# EAGLE board io (EAGLE 5.12)
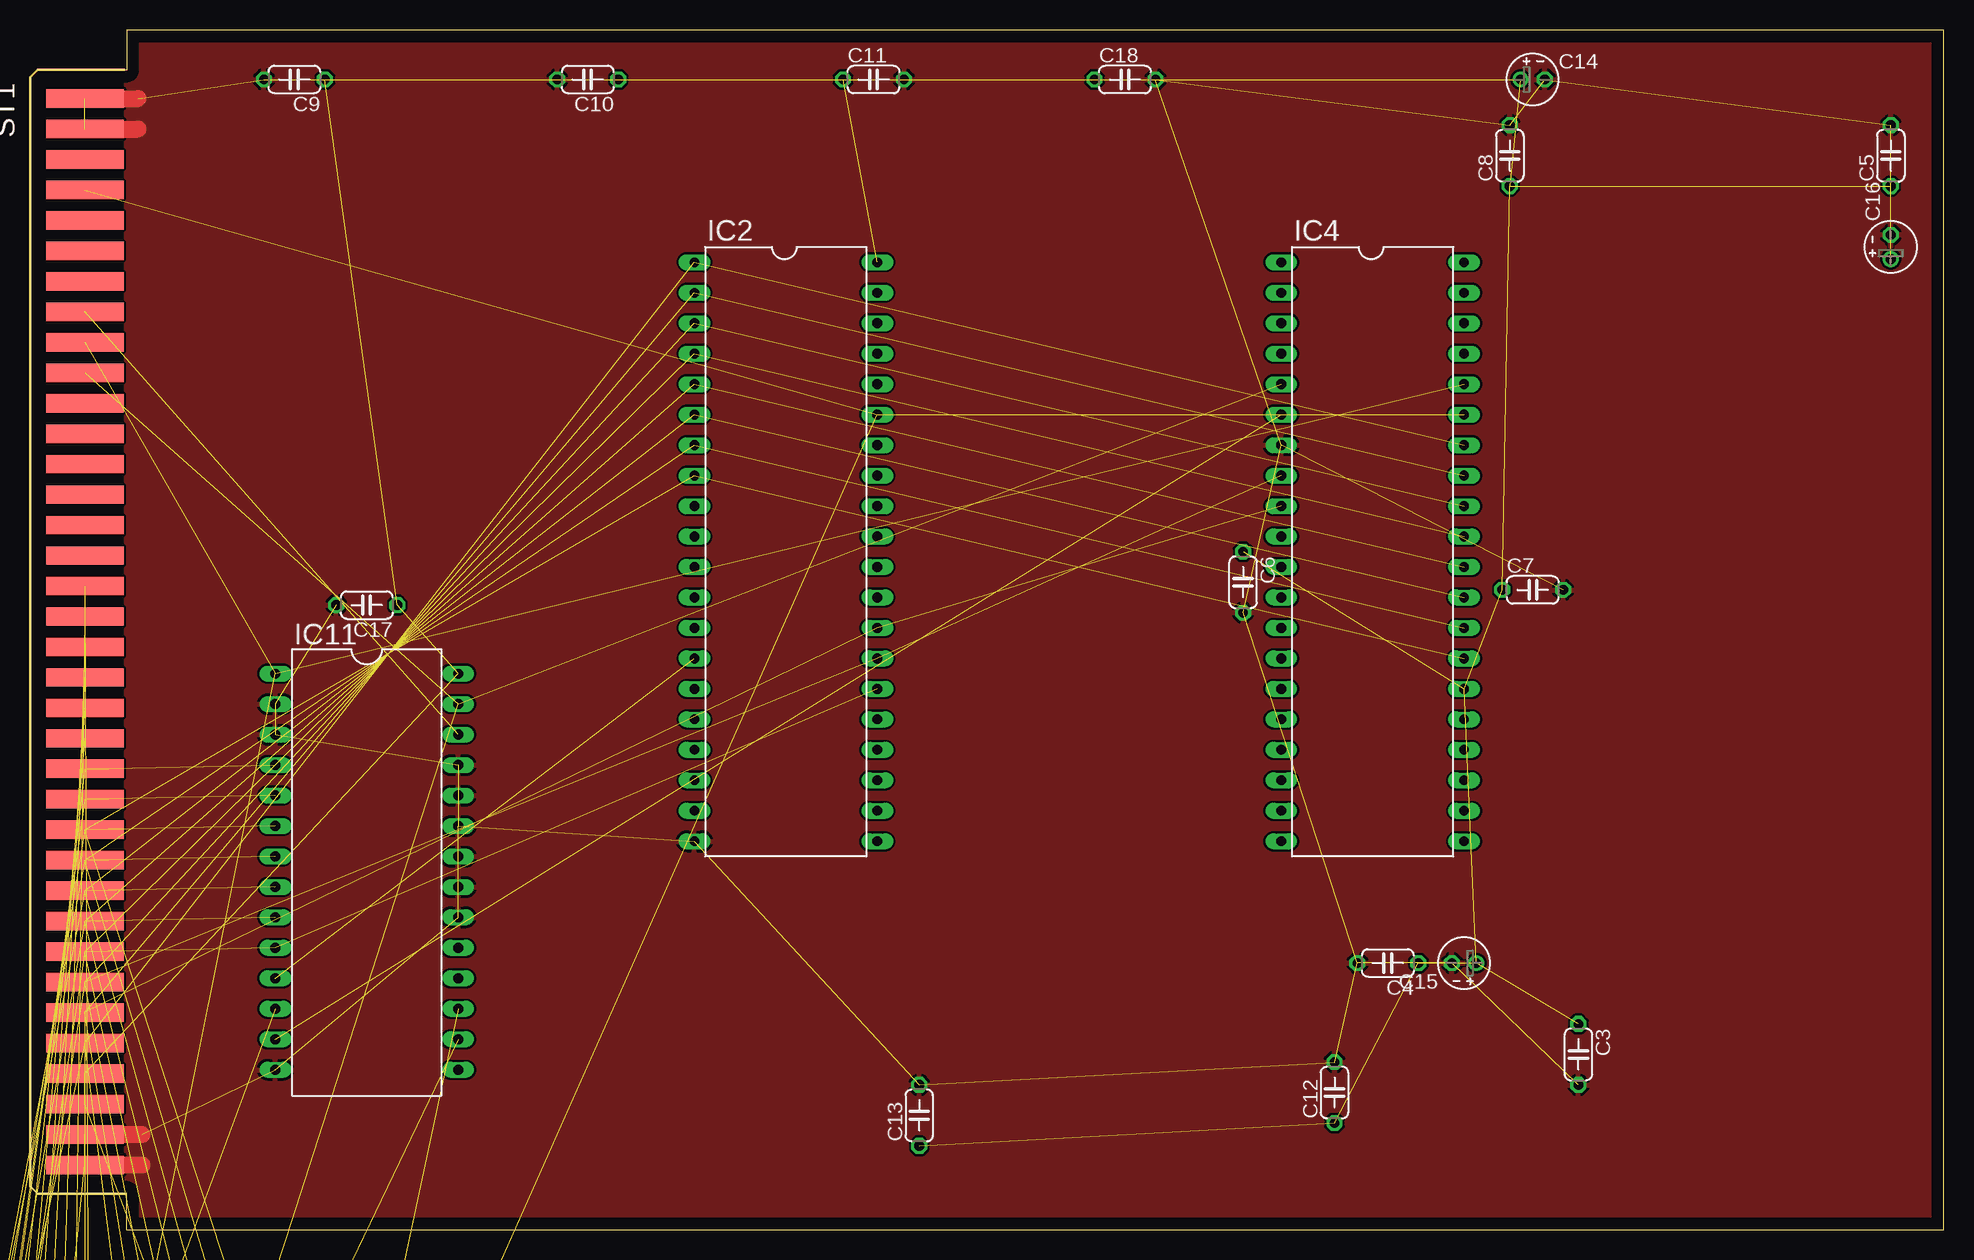
[diagram p0: board, top side]
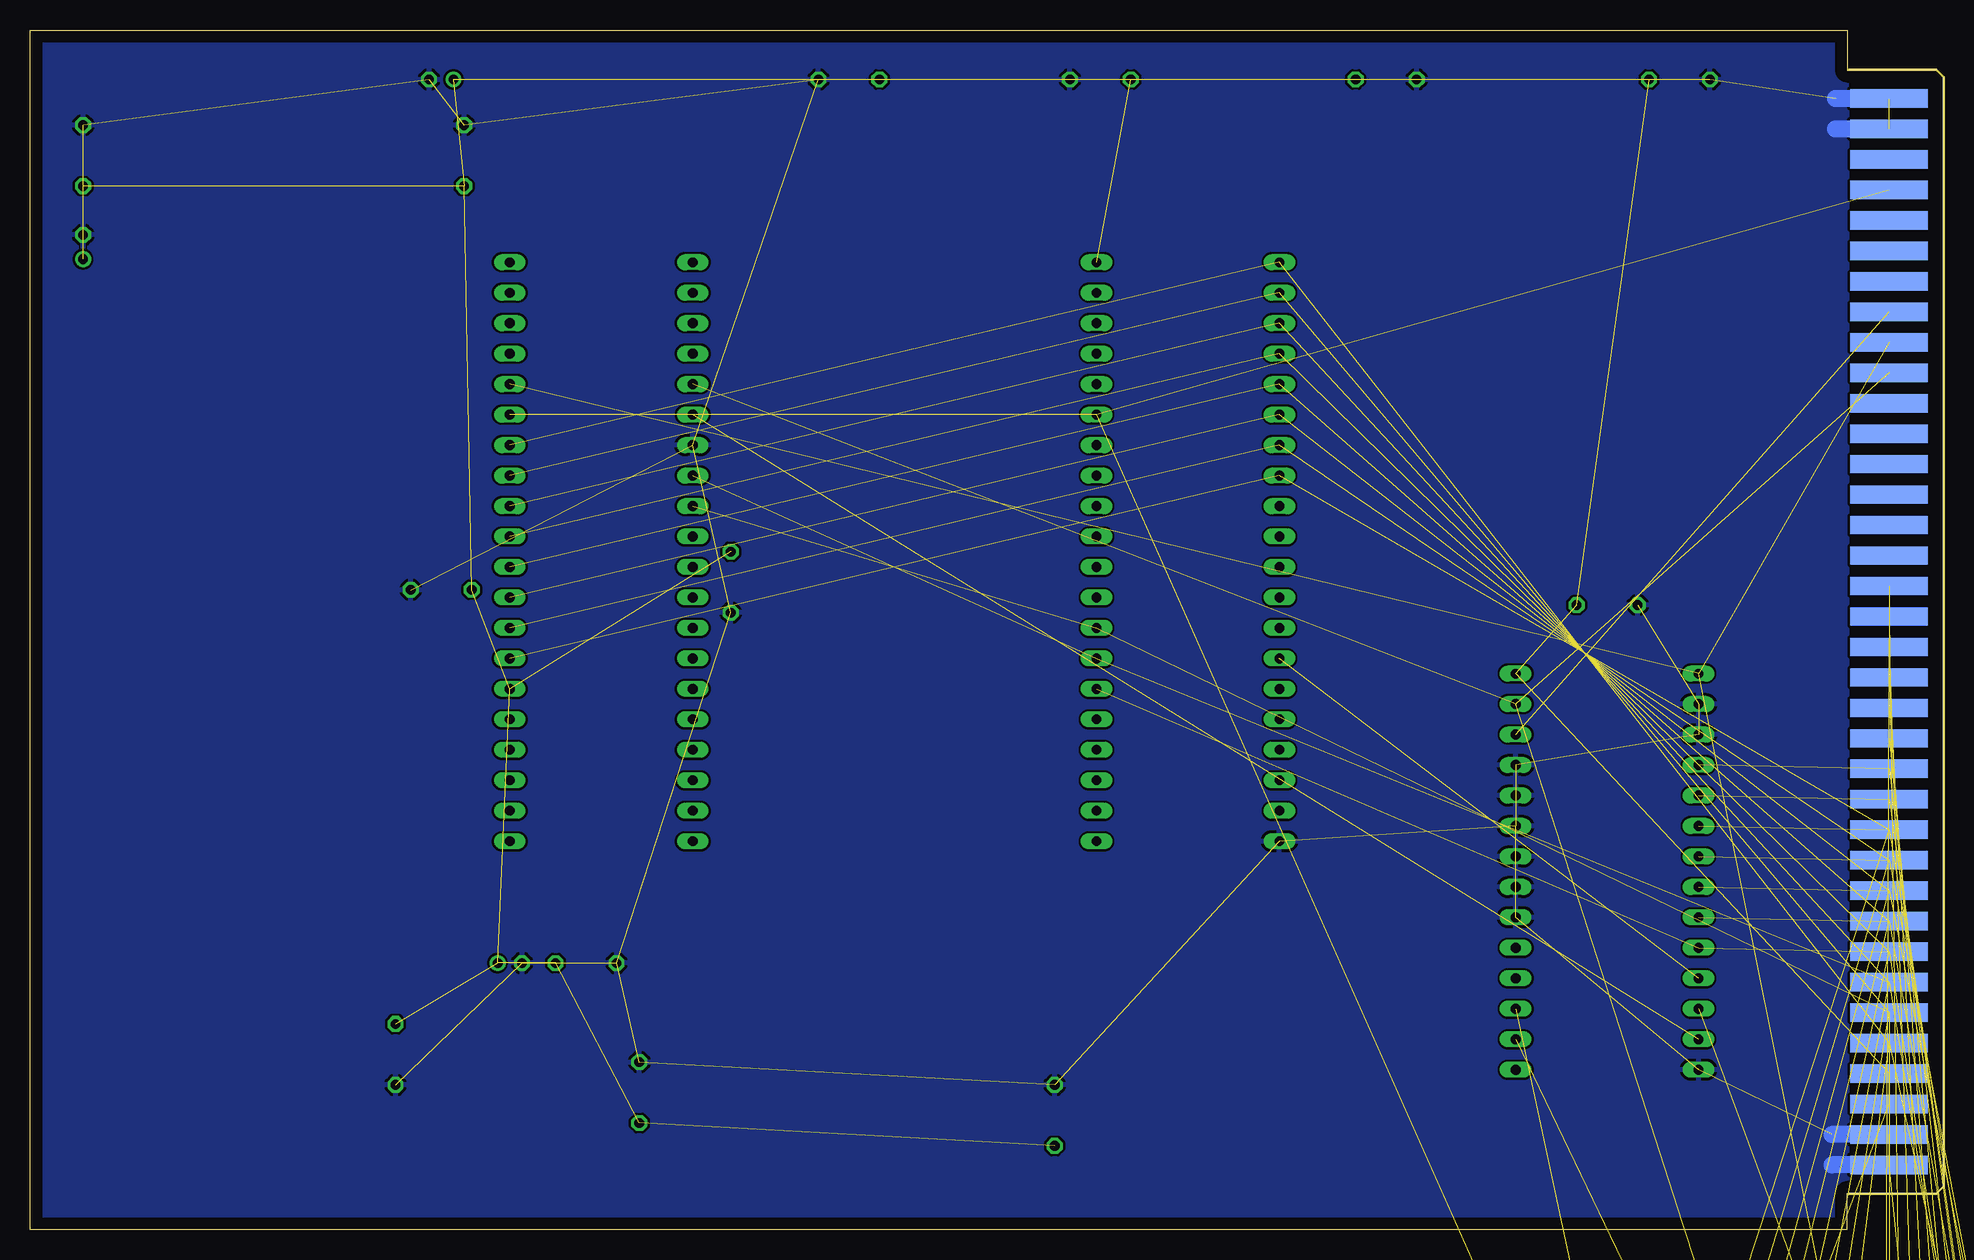
[diagram p1: board, bottom side, seen from below]

Size 159.49 x 100.01 mm. Coordinates in mm from the lower left corner, seen from the top.
Outline: 8.06,100 159.49,100 159.49,0 8.06,0 8.06,3.02 7.91,3.02
Outline: 8.06,100.01 8.06,96.68 7.91,96.68
Copper layers (1*16): Top 0.035mm / dielectric 1.5mm / Bottom 0.035mm
Design rules "default *": minimum track width 10mil, minimum drill 0.3mm, track to track 8mil, track to pad 8mil, pad to pad 8mil, via to via 8mil, smd to smd 8mil, copper to edge 40mil, drill to drill 8mil, minimum pad ring 10mil, minimum via ring 8mil, stop-mask expansion 4mil, vias tented up to drill 0mil, thermal gap 10mil

## Footprints (pad centres in the part's own frame; a part is rotated, then mirrored left to right if it is on the bottom)
C025-025X050 = drill 0.813 octagon: 1 -1.27,0; 2 1.27,0
C050-024X044 = drill 0.813 octagon: 1 -2.54,0; 2 2.54,0
E2-4 = drill 0.813 pad 1.27 round: + -1.016,0 | drill 0.813 pad 1.27 octagon: - 1.016,0
C025-024X044 = drill 0.813 octagon: 1 -1.27,0; 2 1.27,0
DIL28-3 = drill 0.813 long: 1 -16.51,-3.81; 2 -13.97,-3.81; 3 -11.43,-3.81; 4 -8.89,-3.81; 5 -6.35,-3.81; 6 -3.81,-3.81; 7 -1.27,-3.81; 8 1.27,-3.81; 9 3.81,-3.81; 10 6.35,-3.81; 11 8.89,-3.81; 12 11.43,-3.81; 13 13.97,-3.81; 14 16.51,-3.81; 15 16.51,3.81; 16 13.97,3.81; 17 11.43,3.81; 18 8.89,3.81; 19 6.35,3.81; 20 3.81,3.81; 21 1.27,3.81; 22 -1.27,3.81; 23 -3.81,3.81; 24 -6.35,3.81; 25 -8.89,3.81; 26 -11.43,3.81; 27 -13.97,3.81; 28 -16.51,3.81
DIL40 = drill 0.813 long: 1 -24.13,-7.62; 2 -21.59,-7.62; 3 -19.05,-7.62; 4 -16.51,-7.62; 5 -13.97,-7.62; 6 -11.43,-7.62; 7 -8.89,-7.62; 8 -6.35,-7.62; 9 -3.81,-7.62; 10 -1.27,-7.62; 11 1.27,-7.62; 12 3.81,-7.62; 13 6.35,-7.62; 14 8.89,-7.62; 15 11.43,-7.62; 16 13.97,-7.62; 17 16.51,-7.62; 18 19.05,-7.62; 19 21.59,-7.62; 20 24.13,-7.62; 21 24.13,7.62; 22 21.59,7.62; 23 19.05,7.62; 24 16.51,7.62; 25 13.97,7.62; 26 11.43,7.62; 27 8.89,7.62; 28 6.35,7.62; 29 3.81,7.62; 30 1.27,7.62; 31 -1.27,7.62; 32 -3.81,7.62; 33 -6.35,7.62; 34 -8.89,7.62; 35 -11.43,7.62; 36 -13.97,7.62; 37 -16.51,7.62; 38 -19.05,7.62; 39 -21.59,7.62; 40 -24.13,7.62
DIL16 = drill 0.813 long: 1 -8.89,-3.81; 2 -6.35,-3.81; 3 -3.81,-3.81; 4 -1.27,-3.81; 5 1.27,-3.81; 6 3.81,-3.81; 7 6.35,-3.81; 8 8.89,-3.81; 9 8.89,3.81; 10 6.35,3.81; 11 3.81,3.81; 12 1.27,3.81; 13 -1.27,3.81; 14 -3.81,3.81; 15 -6.35,3.81; 16 -8.89,3.81
DIL20 = drill 0.813 long: 1 -11.43,-3.81; 2 -8.89,-3.81; 3 -6.35,-3.81; 4 -3.81,-3.81; 5 -1.27,-3.81; 6 1.27,-3.81; 7 3.81,-3.81; 8 6.35,-3.81; 9 8.89,-3.81; 10 11.43,-3.81; 11 11.43,3.81; 12 8.89,3.81; 13 6.35,3.81; 14 3.81,3.81; 15 1.27,3.81; 16 -1.27,3.81; 17 -3.81,3.81; 18 -6.35,3.81; 19 -8.89,3.81; 20 -11.43,3.81
DIL14 = drill 0.813 long: 1 -7.62,-3.81; 2 -5.08,-3.81; 3 -2.54,-3.81; 4 0,-3.81; 5 2.54,-3.81; 6 5.08,-3.81; 7 7.62,-3.81; 8 7.62,3.81; 9 5.08,3.81; 10 2.54,3.81; 11 0,3.81; 12 -2.54,3.81; 13 -5.08,3.81; 14 -7.62,3.81
DIL28-6 = drill 0.813 long: 1 -16.51,-7.62; 2 -13.97,-7.62; 3 -11.43,-7.62; 4 -8.89,-7.62; 5 -6.35,-7.62; 6 -3.81,-7.62; 7 -1.27,-7.62; 8 1.27,-7.62; 9 3.81,-7.62; 10 6.35,-7.62; 11 8.89,-7.62; 12 11.43,-7.62; 13 13.97,-7.62; 14 16.51,-7.62; 15 16.51,7.62; 16 13.97,7.62; 17 11.43,7.62; 18 8.89,7.62; 19 6.35,7.62; 20 3.81,7.62; 21 1.27,7.62; 22 -1.27,7.62; 23 -3.81,7.62; 24 -6.35,7.62; 25 -8.89,7.62; 26 -11.43,7.62; 27 -13.97,7.62; 28 -16.51,7.62
HC49/S = drill 0.813 round: 1 -2.413,0; 2 2.413,0
DIL14S = drill 0.813 round: 1 -7.62,-3.81; 7 7.62,-3.81; 8 7.62,3.81; 14 -7.62,3.81
0207/7 = drill 0.813 octagon: 1 -3.81,0; 2 3.81,0
MINI8086_CON = smd 1.524 x 6.477: A1 -5.08,5.08; A2 -7.62,5.08; A3 -10.16,5.08; A4 -12.7,5.08; A5 -15.24,5.08; A6 -17.78,5.08; A7 -20.32,5.08; A8 -22.86,5.08; A9 -25.4,5.08; A10 -27.94,5.08; A11 -30.48,5.08; A12 -33.02,5.08; A13 -35.56,5.08; A14 -38.1,5.08; A15 -40.64,5.08; A16 -43.18,5.08; A17 -45.72,5.08; A18 -48.26,5.08; A19 -50.8,5.08; A20 -53.34,5.08; A21 -55.88,5.08; A22 -58.42,5.08; A23 -60.96,5.08; A24 -63.5,5.08; A25 -66.04,5.08; A26 -68.58,5.08; A27 -71.12,5.08; A28 -73.66,5.08; A29 -76.2,5.08; A30 -78.74,5.08; A31 -81.28,5.08; A32 -83.82,5.08; A33 -86.36,5.08; A34 -88.9,5.08; A35 -91.44,5.08; A36 -93.98,5.08 | smd 1.524 x 6.477 bottom: B1 -5.08,5.08; B2 -7.62,5.08; B3 -10.16,5.08; B4 -12.7,5.08; B5 -15.24,5.08; B6 -17.78,5.08; B7 -20.32,5.08; B8 -22.86,5.08; B9 -25.4,5.08; B10 -27.94,5.08; B11 -30.48,5.08; B12 -33.02,5.08; B13 -35.56,5.08; B14 -38.1,5.08; B15 -40.64,5.08; B16 -43.18,5.08; B17 -45.72,5.08; B18 -48.26,5.08; B19 -50.8,5.08; B20 -53.34,5.08; B21 -55.88,5.08; B22 -58.42,5.08; B23 -60.96,5.08; B24 -63.5,5.08; B25 -66.04,5.08; B26 -68.58,5.08; B27 -71.12,5.08; B28 -73.66,5.08; B29 -76.2,5.08; B30 -78.74,5.08; B31 -81.28,5.08; B32 -83.82,5.08; B33 -86.36,5.08; B34 -88.9,5.08; B35 -91.44,5.08; B36 -93.98,5.08
MDIN06S = drill 0.9 octagon: 1 1.3,8.5; 2 -1.3,8.5; 3 3.4,8.5; 4 -3.4,8.5; 5 3.4,11; 6 -3.4,11 | drill 0.7 long: M 0,4.7

## Placement (x,y rotation side)
C1  47p  [C025-025X050]  -18.92,-137.16 0 top  (outside the outline)
C2  47p  [C025-025X050]  -18.92,-142.24 0 top  (outside the outline)
C3  100n  [C050-024X044]  129.03,14.61 270 top
C4  100n  [C050-024X044]  113.16,22.23 180 top
C5  100n  [C050-024X044]  155.07,89.53 90 top
C6  100n  [C050-024X044]  101.09,53.98 270 top
C7  100n  [C050-024X044]  125.22,53.34 0 top
C8  100n  [C050-024X044]  123.32,89.53 90 top
C9  100n  [C050-024X044]  22.03,95.89 180 top
C10  100n  [C050-024X044]  46.48,95.89 180 top
C11  100n  [C050-024X044]  70.29,95.89 0 top
C12  100n  [C050-024X044]  108.71,11.43 90 top
C13  100n  [C050-024X044]  74.1,9.53 90 top
C14  10µ  [E2-4]  125.22,95.89 0 top
C15  10µ  [E2-4]  119.51,22.23 180 top
C16  10µ  [E2-4]  155.07,81.92 90 top
C17  100n  [C050-024X044]  28.07,52.07 180 top
C18  100n  [C050-024X044]  91.25,95.89 0 top
C19  47p  [C025-025X050]  -25.27,-142.88 0 top  (outside the outline)
C20  25p  [C025-024X044]  -25.91,-150.5 0 top  (outside the outline)
C21  5p  [C025-024X044]  -25.91,-155.57 0 top  (outside the outline)
IC1  [DIL28-3]  -0.51,-66.04 0 top  (outside the outline)
IC2  16550  [DIL40]  62.99,56.52 270 top
IC3  MAX232  [DIL16]  -7.49,-53.34 0 top  (outside the outline)
IC4  8255  [DIL40]  111.89,56.52 270 top
IC5  8042  [DIL40]  8.38,-37.47 0 top  (outside the outline)
IC6  74HC245N  [DIL20]  -5.59,-78.74 0 top  (outside the outline)
IC7  74HC245N  [DIL20]  -6.22,-91.44 0 top  (outside the outline)
IC8  7407N  [DIL14]  -10.67,-104.14 0 top  (outside the outline)
IC9  7404N  [DIL14]  -10.67,-116.84 0 top  (outside the outline)
IC10  74367N  [DIL16]  -31.62,-175.9 0 top  (outside the outline)
IC11  27C512AP  [DIL28-6]  28.07,29.84 270 top
IC12  74367N  [DIL16]  -31.62,-188.59 0 top  (outside the outline)
IC13  74HC573N  [DIL20]  -29.08,-234.95 0 top  (outside the outline)
IC14  PIC18F2480-I/SP  [DIL28-3]  -24,-222.25 0 top  (outside the outline)
IC15  74LS74N  [DIL14]  -33.53,-262.89 0 top  (outside the outline)
Q1  8 MHz  [HC49/S]  -22.73,-163.83 0 top  (outside the outline)
QG1  [DIL14S]  -34.16,-250.19 0 top  (outside the outline)
R1  4K7  [0207/7]  -17.02,-127 0 top  (outside the outline)
R2  4K7  [0207/7]  -17.02,-132.08 0 top  (outside the outline)
ST1  [MINI8086_CON]  -0.51,0.32 270 top
X1  Keyboard  [MDIN06S]  -36.7,-168.28 0 top  (outside the outline)

## Library data of the parts
C1-C21 R1 R2 = rcl
IC1 = memory-hitachi; OC_FARNELL: unknown; OC_NEWARK: unknown
IC2 = exar; MPN: ST16C450CP40; OC_FARNELL: 1294801; OC_NEWARK: 24R1445
IC3 = maxim; MF: MAXIM; MPN: MAX232ACPE+; OC_FARNELL: 9723773; OC_NEWARK: 68K4544
IC4 IC5 = micro-intel; OC_FARNELL: unknown; OC_NEWARK: unknown
IC6 IC7 IC9 IC13 = 74xx-eu
IC8 IC10 IC12 IC15 = 74xx-us
IC11 = microchip; MPN: M27C512-90B6; OC_FARNELL: 1642690; OC_NEWARK: 20M6389
IC14 = microchip; MF: MICROCHIP; MPN: PIC18F2480-I/SP; OC_FARNELL: 9321217; OC_NEWARK: 71J7237
Q1 = crystal; OC_FARNELL: 1667008; OC_NEWARK: unknown
QG1 = crystal; OC_FARNELL: unknown; OC_NEWARK: unknown
ST1 = con-mini8086
X1 = con-yamaichi; OC_FARNELL: unknown; OC_NEWARK: unknown

## Nets
/BHE: ST1.B30
/CLR_PORT_REC: IC14.6 IC15.1
/IO2: IC2.14 IC11.11
/IO3: IC5.6 IC11.12
/IO4: IC4.6 IC11.13
/IO5: IC11.15
/RAM_CS: IC1.20 IC14.3
/RD: IC4.5 IC5.10 IC11.27 ST1.B27
/RD_BUF: IC1.22 IC6.19 IC7.19 IC10.1 IC10.15 IC11.16 IC12.1
/RD_CTRLPORT: IC13.1 IC14.4
/RESET: IC5.4 IC9.4 IC14.1
/WR: IC4.36 IC5.8 IC11.1 ST1.B28
/WR_BUF: IC1.27 IC14.2
/WR_CTRLPORT: IC11.17 IC13.11 IC15.4
A0: IC10.2 ST1.A5
A1: IC2.28 IC4.9 IC5.9 IC10.4 ST1.A6
A2: IC2.27 IC4.8 IC10.6 ST1.A7
A3: IC2.26 IC10.10 IC11.10 ST1.A8
A4: IC10.12 IC11.9 ST1.A9
A5: IC10.14 IC11.8 ST1.A10
A6: IC11.7 IC12.2 ST1.A11
A7: IC11.6 IC12.4 ST1.A12
A8: IC11.5 IC12.6 ST1.A13
A9: IC11.4 ST1.A14
A10: ST1.A15
A11: ST1.A16
A12: ST1.A17
A13: ST1.A18
A14: ST1.A19
A15: ST1.A20
A16: ST1.A21
A17: ST1.A22
A18: ST1.A23
A19: ST1.A24
D0: IC2.1 IC4.34 IC5.12 IC6.18 IC13.2 ST1.B5
D1: IC2.2 IC4.33 IC5.13 IC6.17 IC13.3 ST1.B6
D2: IC2.3 IC4.32 IC5.14 IC6.16 IC13.4 ST1.B7
D3: IC2.4 IC4.31 IC5.15 IC6.15 IC13.5 ST1.B8
D4: IC2.5 IC4.30 IC5.16 IC6.14 IC13.6 ST1.B9
D5: IC2.6 IC4.29 IC5.17 IC6.13 IC13.7 ST1.B10
D6: IC2.7 IC4.28 IC5.18 IC6.12 IC13.8 ST1.B11
D7: IC2.8 IC4.27 IC5.19 IC6.11 IC13.9 ST1.B12
D8: IC7.18 ST1.B13
D9: IC7.17 ST1.B14
D10: IC7.16 ST1.B15
D11: IC7.15 ST1.B16
D12: IC7.14 ST1.B17
D13: IC7.13 ST1.B18
D14: IC7.12 ST1.B19
D15: IC7.11 ST1.B20
GND: C1.2 C2.2 C3.2 C4.2 C5.2 C6.2 C7.2 C8.2 C9.2 C10.2 C11.2 C12.2 C13.2 C14.- C15.- C16.- C17.2 C18.2 C19.2 C20.2 C21.1 IC1.1 IC1.2 IC1.14 IC1.21 IC1.23 IC1.24 IC1.26 IC2.20 IC3.15 IC4.7 IC5.7 IC5.20 IC6.10 IC7.10 IC8.7 IC9.7 IC10.8 IC11.2 IC11.3 IC11.14 IC11.20 IC11.21 IC11.22 IC11.23 IC11.24 IC11.25 IC12.8 IC12.10 IC12.12 IC12.14 IC12.15 IC13.10 IC14.8 IC14.19 IC15.2 IC15.3 IC15.7 QG1.7 ST1.A1 ST1.A2 ST1.A35 ST1.A36 ST1.B1 ST1.B2 ST1.B35 ST1.B36 X1.3
IRQ2: ST1.B21
IRQ3: ST1.B22
IRQ4: ST1.B23
IRQ5: ST1.B24
IRQ6: ST1.B25
IRQ7: ST1.B26
KBD_CLK: C2.1 IC5.1 IC8.2 R1.1 X1.5
KBD_DATA: C1.1 IC5.39 IC8.4 R2.1 X1.1
M/IO: IC11.26 ST1.B29
N$1: IC8.1 IC9.2
N$6: C21.2 IC5.2 Q1.2
N$7: C20.1 IC5.3 Q1.1
N$30: IC14.9 QG1.8
N$39: IC14.10
P26: IC5.37 IC9.1
P27: IC5.38 IC8.3
PORT_REC: IC14.5 IC15.5
RAM_A0: IC1.10 IC10.3 IC14.11
RAM_A1: IC1.9 IC10.5 IC14.12
RAM_A2: IC1.8 IC10.7 IC14.13
RAM_A3: IC1.7 IC10.9 IC14.14
RAM_A4: IC1.6 IC10.11 IC14.15
RAM_A5: IC1.5 IC10.13 IC14.16
RAM_A6: IC1.4 IC12.3 IC14.17
RAM_A7: IC1.3 IC12.5 IC14.18
RAM_A8: IC1.25 IC12.7
RB0: IC1.11 IC6.2 IC7.2 IC13.19
RB1: IC1.12 IC6.3 IC7.3 IC13.18
RB2: IC1.13 IC6.4 IC7.4 IC13.17
RB3: IC1.15 IC6.5 IC7.5 IC13.16
RB4: IC1.16 IC6.6 IC7.6 IC13.15
RB5: IC1.17 IC6.7 IC7.7 IC13.14
RB6: IC1.18 IC6.8 IC7.8 IC13.13
RB7: IC1.19 IC6.9 IC7.9 IC13.12
RESET: IC2.35 IC4.35 IC9.3 ST1.B33
VCC: C3.1 C4.1 C5.1 C6.1 C7.1 C8.1 C9.1 C10.1 C11.1 C12.1 C13.1 C14.+ C15.+ C16.+ C17.1 C18.1 C19.1 IC1.28 IC2.40 IC3.16 IC4.26 IC5.5 IC5.25 IC5.26 IC5.40 IC6.1 IC6.20 IC7.1 IC7.20 IC8.14 IC9.14 IC10.16 IC11.28 IC12.16 IC13.20 IC14.20 IC15.14 QG1.14 R1.2 R2.2 ST1.A3 ST1.A4 ST1.B3 ST1.B4 X1.4

## Tracks (layer width: path | path; a pad name or v marks a point on that pad's centre or on a via)
/CLR_PORT_REC  (1 unrouted)
/IO2  (1 unrouted)
/IO3  (1 unrouted)
/IO4  (1 unrouted)
/RAM_CS  (1 unrouted)
/RD  (3 unrouted)
/RD_BUF  (6 unrouted)
/RD_CTRLPORT  (1 unrouted)
/RESET  (2 unrouted)
/WR  (3 unrouted)
/WR_BUF  (1 unrouted)
/WR_CTRLPORT  (2 unrouted)
A0  (1 unrouted)
A1  (4 unrouted)
A2  (3 unrouted)
A3  (3 unrouted)
A4  (2 unrouted)
A5  (2 unrouted)
A6  (2 unrouted)
A7  (2 unrouted)
A8  (2 unrouted)
A9  (1 unrouted)
D0  (5 unrouted)
D1  (5 unrouted)
D2  (5 unrouted)
D3  (5 unrouted)
D4  (5 unrouted)
D5  (5 unrouted)
D6  (5 unrouted)
D7  (5 unrouted)
D8  (1 unrouted)
D9  (1 unrouted)
D10  (1 unrouted)
D11  (1 unrouted)
D12  (1 unrouted)
D13  (1 unrouted)
D14  (1 unrouted)
D15  (1 unrouted)
GND  (67 unrouted)
  Top 1.422: ST1.B36 9.02,94.3 | ST1.B35 9.02,91.76 | ST1.A1 9.33,5.4 | ST1.A2 9.33,7.94
  Bottom 1.422: ST1.B36 9.02,94.3 | ST1.B35 9.02,91.76 | ST1.A1 9.33,5.4 | ST1.A2 9.33,7.94
  pour Bottom: 8.06,100.33 159.51,100.33 159.51,0 8.06,0
  pour Top: 8.06,100.33 159.51,100.33 159.51,0 8.06,0
KBD_CLK  (4 unrouted)
KBD_DATA  (4 unrouted)
M/IO  (1 unrouted)
N$1  (1 unrouted)
N$6  (2 unrouted)
N$7  (2 unrouted)
N$30  (1 unrouted)
P26  (1 unrouted)
P27  (1 unrouted)
PORT_REC  (1 unrouted)
RAM_A0  (2 unrouted)
RAM_A1  (2 unrouted)
RAM_A2  (2 unrouted)
RAM_A3  (2 unrouted)
RAM_A4  (2 unrouted)
RAM_A5  (2 unrouted)
RAM_A6  (2 unrouted)
RAM_A7  (2 unrouted)
RAM_A8  (1 unrouted)
RB0  (3 unrouted)
RB1  (3 unrouted)
RB2  (3 unrouted)
RB3  (3 unrouted)
RB4  (3 unrouted)
RB5  (3 unrouted)
RB6  (3 unrouted)
RB7  (3 unrouted)
RESET  (3 unrouted)
VCC  (44 unrouted)